# Allegro board Amp.brd
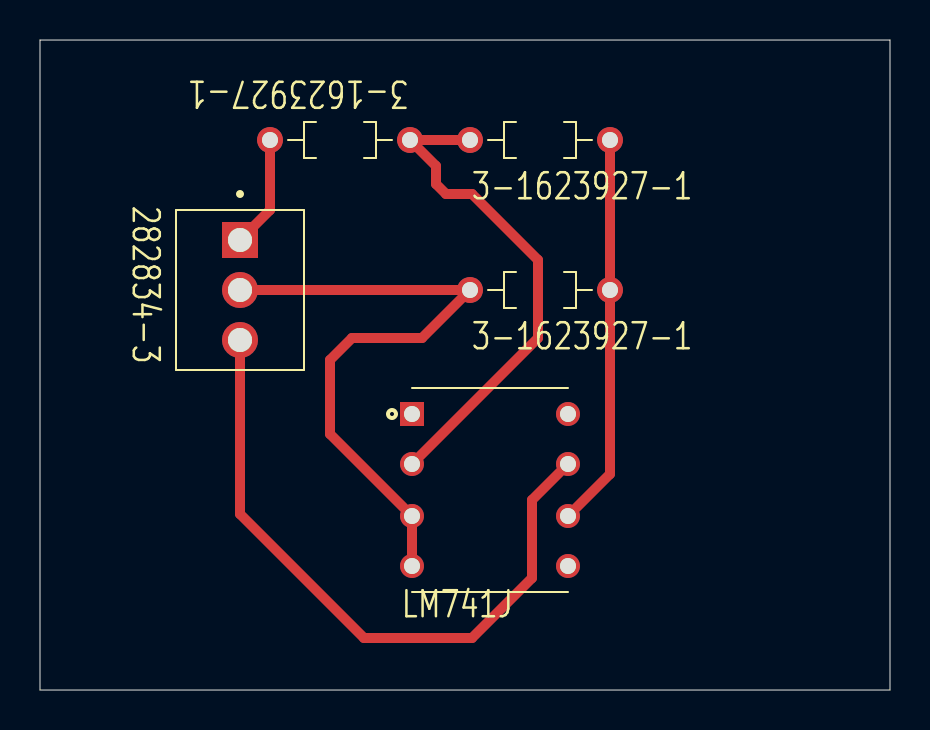
[diagram p0: board, top side]
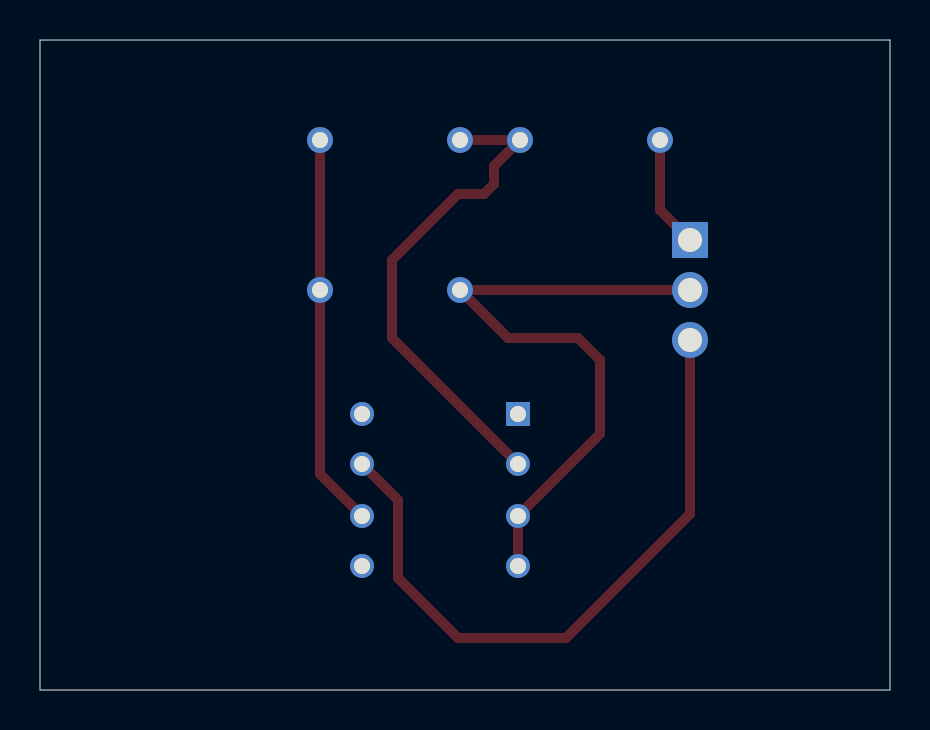
[diagram p1: board, bottom side, seen from below]

Outline 42.5 x 32.5 mm; copper layers: TOP, BOTTOM. Coordinates in mm from the lower left corner of the outline.
Outline path: 0,32.5 0,0 42.5,0 42.5,32.5 0,32.5

## Design rules (mm)
constraint set DEFAULT: 
net group N14592: nets N14584 N14592 N15314

## Placement (name value [footprint] x y rotation side)
J1  282834-3  [TE_282834-3]  10 20 270 top
R1  5k  [RESAD700W45L350D185]  25 27.5 0 top
R2  10k  [RESAD700W45L350D185]  25 20 0 top
R3  1k  [RESAD700W45L350D185]  15 27.5 180 top
U2  LM741J  [DIP775W46P254L1016H508Q8]  22.5 10 0 top

## Library data of the parts
J1 = 282834-3
R1-R3 = RESISTOR_1
U2 = LM741J

## Footprints (pads in the part's own frame, mm; a bottom-side part is the same pattern mirrored in y, then rotated)
DIP775W46P254L1016H508Q8
  rect 1.2x1.2 hole 0.8: 1(-3.9,3.8)
  round 1.2 hole 0.8: 2(-3.9,1.3) 3(-3.9,-1.3) 4(-3.9,-3.8) 5(3.9,-3.8) 6(3.9,-1.3) 7(3.9,1.3) 8(3.9,3.8)
RESAD700W45L350D185
  round 1.3 hole 0.8: 1(-3.5,0) 2(3.5,0)
TE_282834-3
  rect 1.8x1.8 hole 1.2: 1(-2.5,0)
  round 1.8 hole 1.2: 2(0,0) 3(2.5,0)

## Nets
12V: J1.3 U2.7
GND: J1.2 R2.1 U2.3 U2.4(\V-\)
N14584: R1.2(\B\) R2.2(\B\) U2.6
N14592: R1.1 R3.1 U2.2
N15314: J1.1 R3.2(\B\)

Pads without a net: U2 1 5 8

## Routing (per net, layer and track width the routed paths; a pad name or vN(x,y) marks a point on that pad's centre or on a via; arc(x,y) is an arc through that point)
12V: length 33.6
  TOP w0.5: J1.3 10,8.8 16.2,2.6 21.6,2.6 24.6,5.6 24.6,9.5 U2.7
GND: length 31.9
  TOP w0.5: U2.4 U2.3 14.5,12.8 14.5,16.5 15.6,17.6 19.1,17.6 R2.1 J1.2
N14584: length 19.7
  TOP w0.5: U2.6 28.5,10.8 R2.2 R1.2
N14592: length 25.2
  TOP w0.5: R1.1 R3.1 19.8,26.2 19.8,25.3 20.3,24.8 21.6,24.8 24.9,21.5 24.9,17.6 U2.2
N15314: length 5.6
  TOP w0.5: J1.1 11.5,24 R3.2
